# Altium PCB pcb_top.PcbDoc
Units mil, origin at the board's own origin, x right, y up, seen from the top; angles counter-clockwise.
Board outline 1425 x 2300 mil, 2 copper layers (Top Layer, Bottom Layer); 41 components, 38 nets, 200 pads, 108 vias.
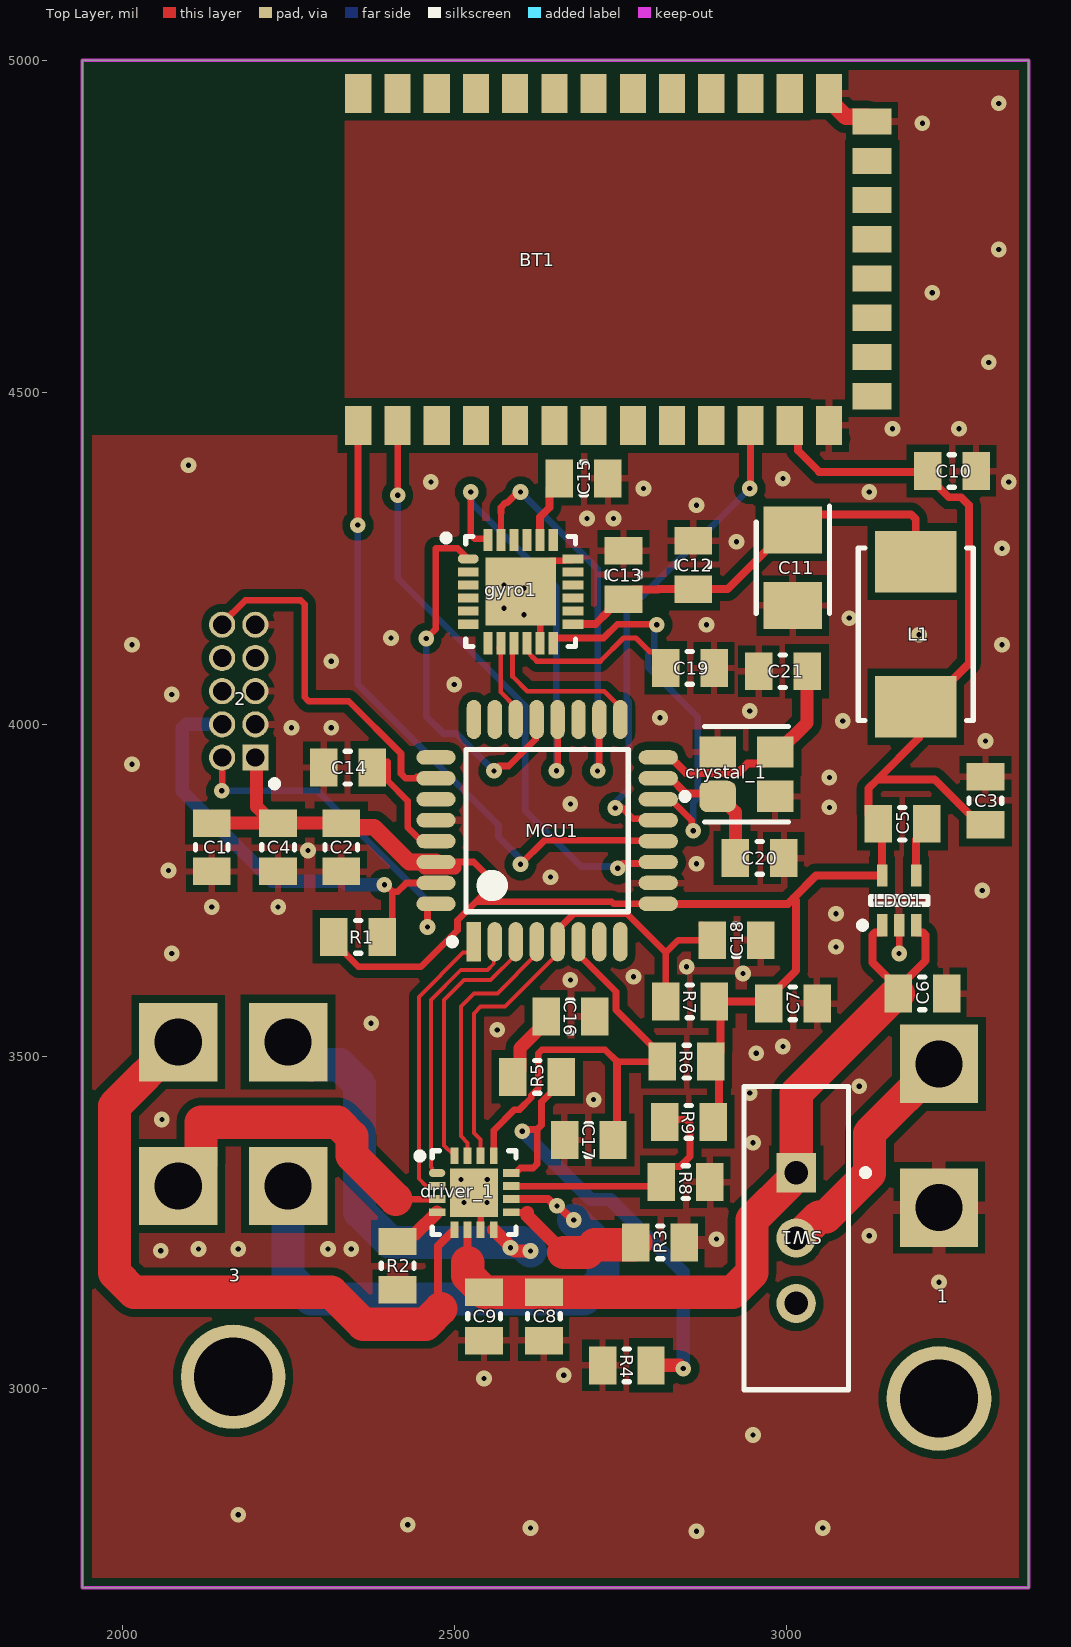
[diagram p0: Top Layer view]
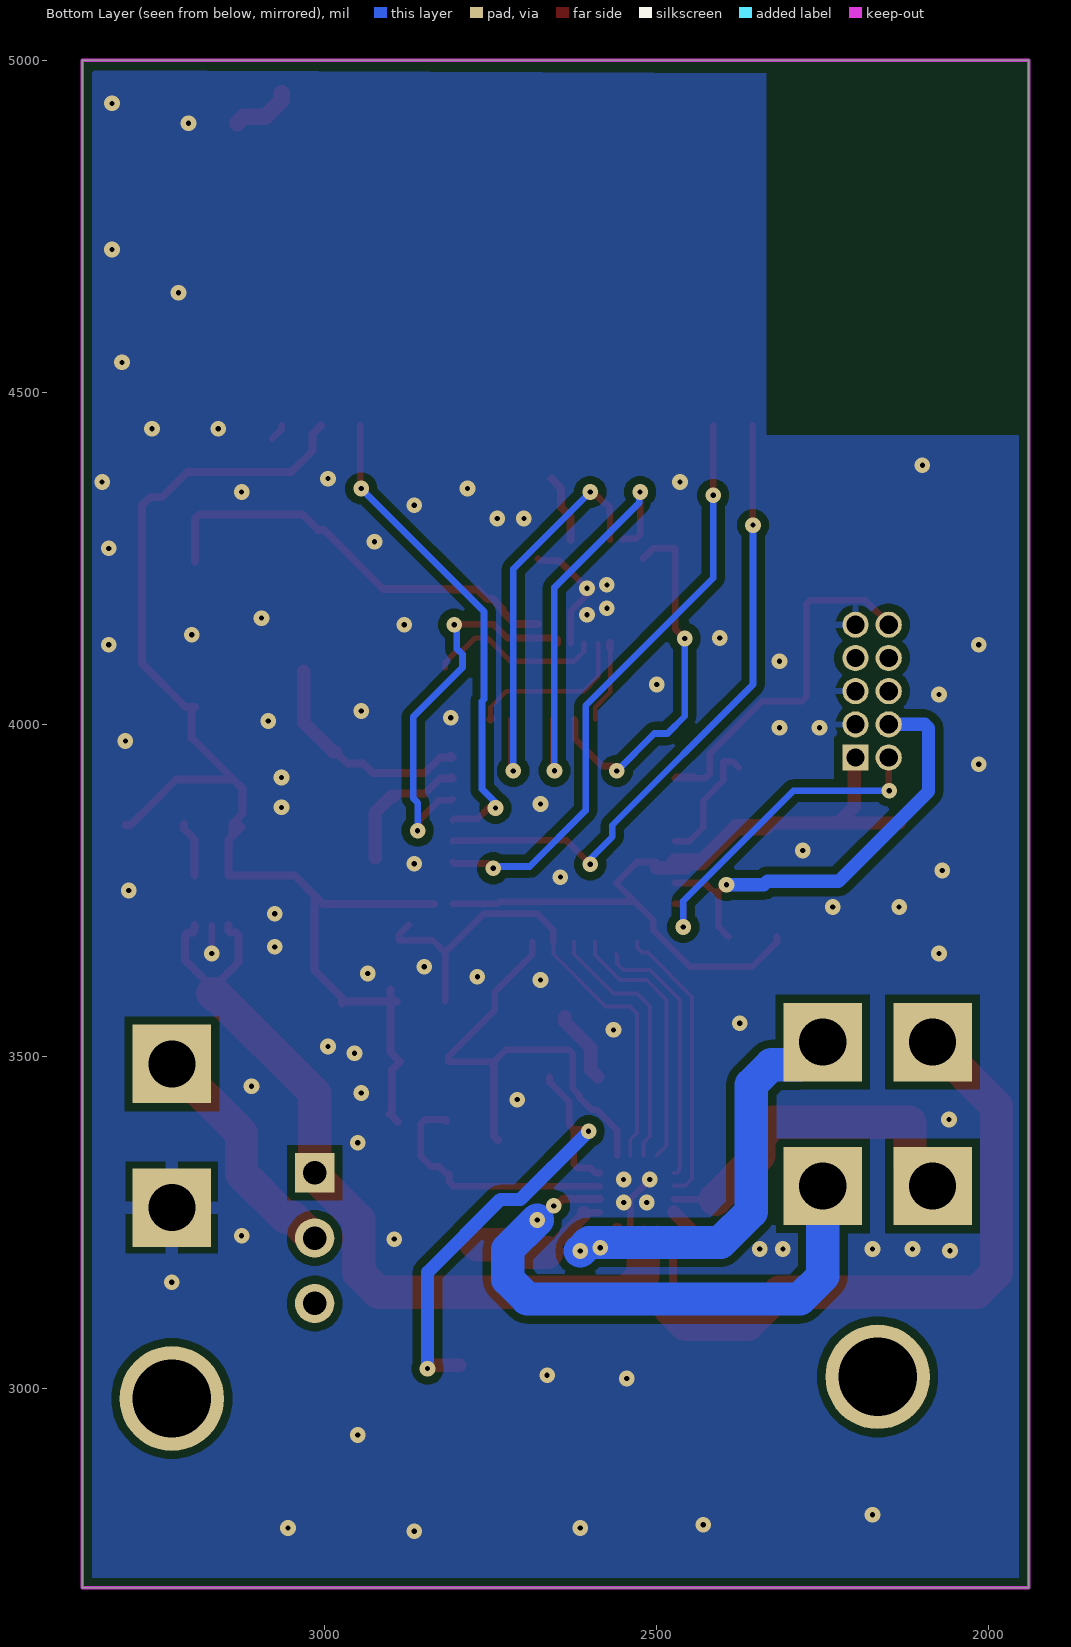
[diagram p1: Bottom Layer view, seen from below]

## Layer stack, top to bottom
Top Solder: solder mask 0.4, Solder Resist, Dk 3.5
Top Layer: signal copper 1.4
Dielectric 1: dielectric 12.6, FR-4, Dk 4.8
Bottom Layer: signal copper 1.4
Bottom Solder: solder mask 0.4, Solder Resist, Dk 3.5

## Board outline
1940,2700 3365,2700 3365,5000 1940,5000

## Design rules (kind name [scope] priority, off if disabled: settings)
Clearance [All] p1: gap=12 ignorepadtopadclearanceinfootprint=TRUE except(0: Arc-Hole Track-Hole SMDPad-Hole THPad-Hole Via-Hole Fill-Hole Poly-Hole Region-Hole Text-Hole; 1.97: Arc-SMDPad Track-SMDPad; 4.13: Arc-Arc Arc-Track Track-Track; 5: Arc-Via Track-Via SMDPad-Via)
HoleSize [All] p1: absolutevalues=TRUE maxlimit=120 minlimit=1 maxpercent=80.000 minpercent=20.000
MinimumSolderMaskSliver [All] p1 off: minsoldermaskwidth=10
PolygonConnect [All] p1: thpad.connectstyle=Relief thpad.reliefconductorwidth=10 thpad.reliefentries=4 thpad.polygonreliefangle="90 Angle" thpad.airgapwidth=10 smdpad.connectstyle=Relief smdpad.reliefconductorwidth=10 smdpad.reliefentries=4 smdpad.polygonreliefangle="90 Angle" smdpad.airgapwidth=10 via.connectstyle=Direct via.reliefconductorwidth=10 via.reliefentries=4 via.polygonreliefangle="90 Angle" via.airgapwidth=10
RoutingVias [All] p1: holewidth=7.87 width=23.62 viastyle="Through Hole" minholewidth=7.87 minwidth=23.62 maxholewidth=120 maxwidth=120
SilkToSilkClearance [All] p1 off: silktosilkclearance=10
SilkToSolderMaskClearance [IsPad] p1 off: minsilkscreentomaskgap=10 clearancetoexposedcopper=TRUE
SolderMaskExpansion [All] p1: expansion=4 istentingtop=FALSE
Width [All] p1: maxlimit=100 minlimit=1 preferedwidth=10 toplayer_minwidth=5.91 minimp=50.000000 maximp=50.000000 favimp=50.000000
26 further rules are at their usual default settings.

## Components (designator, comment, footprint, x,y, rotation, side; value= is the part's Value field where it differs from the comment)
1 "39-30-1020" 39-30-1020 3230,2985 r0 top
2 "konektor - GPEA214-0502A005C1BA" "konektor - GPEA214-0502A005C1BA" 2150.74,3950 r90 top
3 "39-30-1040" 39-30-1040 2167.32,3017.6 r0 top
BT1 "BlueTooth module - egbt046s_hc-05" BT_EGBT-046S 3135.2,4444.09 r90 top
C1 "10uF" "0805 (2x1.2)" 2135,3815 r270 top
C2 "10nF" "0805 (2x1.2)" 2330,3815 r270 top
C3 "1uF" "0805 (2x1.2)" 3300,3885 r90 top
C4 "100nF" "0805 (2x1.2)" 2235,3815 r270 top
C5 "10nF" "0805 (2x1.2)" 3175,3850.33 r0 top
C6 "1uF" "0805 (2x1.2)" 3205,3595 r0 top
C7 "100nF" "0805 (2x1.2)" 3010,3580 r0 top
C8 "22uF" "0805 (2x1.2)" 2635,3108.58 r270 top
C9 "2.2uF" "0805 (2x1.2)" 2545,3108.58 r270 top
C10 "100nF" "0805 (2x1.2)" 3249.5,4381.46 r0 top
C11 "100uF" tant_cap_100u 3005,4240 r270 top
C12 "1uF" "0805 (2x1.2)" 2860,4240 r90 top
C13 "100nF" "0805 (2x1.2)" 2755,4225 r90 top
C14 "100nF" "0805 (2x1.2)" 2340,3935 r180 top
C15 "2.2nF" "0805 (2x1.2)" 2695,4370 r0 top
C16 "22nF" "0805 (2x1.2)" 2675,3560 r0 top
C17 "10nF" "0805 (2x1.2)" 2702.75,3374.28 r180 top
C18 "1nF" "0805 (2x1.2)" 2925,3675 r0 top
C19 "100nF" "0805 (2x1.2)" 2855,4085 r0 top
C20 "15pF" "0805 (2x1.2)" 2960,3798.85 r0 top
C21 "15pF" "0805 (2x1.2)" 2995,4080 r180 top
crystal_1 "ABM8G-25.000MHz-B4Y-T" "crystal 3.2x2.5" 2940,3925 r0 top
driver_1 "STSPIN220" "driver - STSPIN220" 2530,3295 r0 top
gyro1 "MPU-6000" "gyro - MPU 6000" 2600,4200 r0 top
L1 "civka - SRR6603-222ML" L_SRR6603-222ML 3195,4135.75 r90 top
LDO1 "MAX8510EXK33+T" "LDO - MAX8510EXK33+T (SC70)" 3170,3735 r90 top
MCU1 "ATSAMD21E18A-AU" "MCU- ATSAMD21E18A-AU" 2640,3840 r90 top
R1 "1kR" "0805 (2x1.2)" 2355.38,3680 r180 top
R2 "330mR" "0805 (2x1.2)" 2415,3185 r90 top
R3 "500mR" "0805 (2x1.2)" 2810,3220 r180 top
R4 "47kR" "0805 (2x1.2)" 2760,3035 r180 top
R5 "1kR" "0805 (2x1.2)" 2625,3469.28 r180 top
R6 "18kR" "0805 (2x1.2)" 2850,3492.16 r0 top
R7 "18kR" "0805 (2x1.2)" 2855,3582.94 r180 top
R8 "1kR" "0805 (2x1.2)" 2848.58,3310.72 r0 top
R9 "18kR" "0805 (2x1.2)" 2853.42,3401.44 r0 top
SW1 "EG1218" "vypinac - EG1218" 3015,3226.57 r270 top

## Footprints (in the part's own frame and the unit in brackets; to place one, negate y for a bottom-side part, rotate by r counter-clockwise, add the part's x,y. Pads: shape width x height; smd on the part's side, far side on the other; paste and mask are expansions set on the pad)
39-30-1020 [mm]
  round 4 hole 3: 0(0,0)
  rect 3x3 hole 1.8: 1(0,7.3) 2(0,12.8)
  body extent -2.7,-6.6 2.7,6.2, height 9.6
39-30-1040 [mm]
  round 4 hole 3: 0(0,0)
  rect 3x3 hole 1.8: 1(2.1,7.3) 2(-2.1,7.3) 3(2.1,12.8) 4(-2.1,12.8)
  body extent -4.8,-6.6 4.8,6.2, height 9.6
"0805 (2x1.2)" [mm] "Chip Resistor, 2-Leads, Body 2.00x1.25mm, IPC Medium Density"
  rect 1.05x1.45 smd: 1(-0.925,0) 2(0.925,0)
  silkscreen extent -0.1,-0.63 0.1,0.63, body extent -1.1,-0.72 1.1,0.72, height 0.5
BT_EGBT-046S [mm]
  rect 1.5x1 smd: 1(0.15,19.8) 2(0.15,18.3) 3(0.15,16.8) 4(0.15,15.3) 5(0.15,13.8) 6(0.15,12.3) 7(0.15,10.8) 8(0.15,9.3) 9(0.15,7.8) 10(0.15,6.3) 11(0.15,4.8) 12(0.15,3.3) 13(0.15,1.8) 22(12.85,1.8) 23(12.85,3.3) 24(12.85,4.8) 25(12.85,6.3) 26(12.85,7.8) 27(12.85,9.3) 28(12.85,10.8) 29(12.85,12.3) 30(12.85,13.8) 31(12.85,15.3) 32(12.85,16.8) 33(12.85,18.3) 34(12.85,19.8)
  rect 1x1.5 smd: 14(1.27,0.15) 15(2.77,0.15) 16(4.27,0.15) 17(5.77,0.15) 18(7.27,0.15) 19(8.77,0.15) 20(10.27,0.15) 21(11.77,0.15)
"crystal 3.2x2.5" [mm]
  rrect50% 1.4x1.2 smd paste+0 mask+0: 1(-1.1,-0.85)
  rect 1.4x1.2 smd paste+0 mask+0: 2(1.1,-0.85) 3(1.1,0.85) 4(-1.1,0.85)
  silkscreen extent -2.47,-1.83 1.6,1.83, body extent -1.9,-1.55 1.9,1.55, height 0.25
"driver - STSPIN220" [mm] "QFN, 24-Leads, Body 4.00x4.00mm, Pitch 0.50mm, Thermal Pad 2.7x2.6mm"
  oval 0.63x0.3 smd: 1(-1.415,0.75)
  rect 0.63x0.3 smd: 2(-1.415,0.25) 3(-1.415,-0.25) 4(-1.415,-0.75) 9(1.415,-0.75) 10(1.415,-0.25) 11(1.415,0.25) 12(1.415,0.75)
  rect 0.3x0.63 smd: 5(-0.75,-1.415) 6(-0.25,-1.415) 7(0.25,-1.415) 8(0.75,-1.415) 13(0.75,1.415) 14(0.25,1.415) 15(-0.25,1.415) 16(-0.75,1.415)
  rect 1.85x1.85 smd: 17(0,0)
  silkscreen extent -2.2,-1.6 1.6,1.6, body extent -1.5,-1.5 1.5,1.5, height 0.95
"gyro - MPU 6000" [mm] "QFN, 24-Leads, Body 4.00x4.00mm, Pitch 0.50mm, Thermal Pad 2.7x2.6mm"
  oval 0.8x0.35 smd: 1(-2,1.25)
  rect 0.8x0.35 smd: 2(-2,0.75) 3(-2,0.25) 4(-2,-0.25) 5(-2,-0.75) 6(-2,-1.25) 13(2,-1.25) 14(2,-0.75) 15(2,-0.25) 16(2,0.25) 17(2,0.75) 18(2,1.25)
  rect 0.35x0.85 smd: 7(-1.25,-1.975) 8(-0.75,-1.975) 9(-0.25,-1.975) 10(0.25,-1.975) 11(0.75,-1.975) 12(1.25,-1.975) 19(1.25,1.975) 20(0.75,1.975) 21(0.25,1.975) 22(-0.25,1.975) 23(-0.75,1.975) 24(-1.25,1.975)
  rect 2.7x2.6 smd: 25(0,0)
  silkscreen extent -2.97,-2.1 2.1,2.17, body extent -2,-2 2,2, height 0.95
"konektor - GPEA214-0502A005C1BA" [mm] "GPEA214-0502A005C1BA"
  rect 1x1 hole 0.7: 1(0,-1.27)
  round 1 hole 0.7: 2(1.27,-1.27) 3(2.54,-1.27) 4(3.81,-1.27) 5(5.08,-1.27) 6(0,0) 7(1.27,0) 8(2.54,0) 9(3.81,0) 10(5.08,0)
  silkscreen extent -1.12,-2.13 -0.88,-1.88, body extent -0.64,-2.33 5.71,1.06, height 0.25
L_SRR6603-222ML [mm]
  rect 2.35x3.1 smd: 1(-2.775,0) 2(2.775,0)
  silkscreen extent -3.3,-2.2 3.3,2.2, body extent -3.4,-2.2 3.4,2.2, height 3.1
"LDO - MAX8510EXK33+T (SC70)" [mm] "SOT353, 5-Leads, Body 2x1.3mm, Pitch 0.65mm, Lead Span 2.1mm, IPC Medium Density"
  rect 0.85x0.4 smd: 1(-0.95,0.65) 2(-0.95,0) 3(-0.95,-0.65) 4(0.95,-0.65) 5(0.95,0.65)
  silkscreen extent -1.07,-1.1 0.15,1.52, body extent -0.67,-1.1 0.68,1.1, height 1.1
"MCU- ATSAMD21E18A-AU" [mm] "TQFP, 32-Leads, Body 7.00x7.00mm, Pitch 0.80mm, IPC Medium Density"
  rect 1.5x0.55 smd: 1(-4.25,2.8)
  oval 1.5x0.55 smd: 2(-4.25,2) 3(-4.25,1.2) 4(-4.25,0.4) 5(-4.25,-0.4) 6(-4.25,-1.2) 7(-4.25,-2) 8(-4.25,-2.8) 17(4.25,-2.8) 18(4.25,-2) 19(4.25,-1.2) 20(4.25,-0.4) 21(4.25,0.4) 22(4.25,1.2) 23(4.25,2) 24(4.25,2.8)
  oval 0.55x1.5 smd: 9(-2.8,-4.25) 10(-2,-4.25) 11(-1.2,-4.25) 12(-0.4,-4.25) 13(0.4,-4.25) 14(1.2,-4.25) 15(2,-4.25) 16(2.8,-4.25) 25(2.8,4.25) 26(2,4.25) 27(1.2,4.25) 28(0.4,4.25) 29(-0.4,4.25) 30(-1.2,4.25) 31(-2,4.25) 32(-2.8,4.25)
  silkscreen extent -4.37,-3.1 3.1,3.75, body extent -3.5,-3.5 3.5,3.5, height 1.2
tant_cap_100u [mm] "tantalum 100uF cap, 6.3V"
  rect 1.8x2.25 smd: 1(-1.344,0.124) 2(1.556,0.124)
  silkscreen extent -2.24,-1.28 1.86,1.52, body extent -1.73,-1.38 1.97,1.62, height 2.11
"vypinac - EG1218" [mm] "THD, 3-Leads, Body 11.6x4mm, Pitch 2.5mm"
  rect 1.5x1.5 hole 0.9: 1(-2.5,0)
  round 1.5 hole 0.9: 2(0,0) 3(2.5,0)
  silkscreen extent -5.8,-2 5.8,2.78, body extent -5.8,-2 5.8,2, height 7.4

## Part data
1: "Connector Wire to Board Header 2 Position 4.2mm Solder Right Angle Thru-Hole Bag", Color=Natural, Contact Resistance=10mR, Current Rating=13A, Flammability Rating="UL94 V-0", Housing Color=Black, Manufacturer=Molex, Max Operating Temperature=105°C, Min Operating Temperature=-40°C, Package Quantity=8000, Voltage Rating=600V, Approvals=UL,CSA,TUV, Category="Headers and Wire Housings", ComponentLink1Description=https://datasheet.ciiva.com/6814/039301100-sd-6814020.pdf?src-supplier=Digi-Key, ComponentLink1URL=https://datasheet.ciiva.com/6814/039301100-sd-6814020.pdf?src-supplier=Digi-Key, ComponentLink2Description=https://datasheet.ciiva.com/11747/0900766b805f2c40-11747493.pdf?src-supplier=RSComponents, ComponentLink2URL=https://datasheet.ciiva.com/11747/0900766b805f2c40-11747493.pdf?src-supplier=RSComponents, ComponentLink3Description=https://datasheet.ciiva.com/30130/183450039301020-pcb-headers-30130157.pdf?src-supplier=Onlinecomponents.com, ComponentLink3URL=https://datasheet.ciiva.com/30130/183450039301020-pcb-headers-30130157.pdf?src-supplier=Onlinecomponents.com, Connector Type="Male Pin", Contact Gender=Male, Contact Material=Brass, Contact Plating=Tin,Copper, Contact Type="Male Pin", Depth=19.4mm, Fastening Type=Ramp, Gender=Male, Height=14.76mm, Housing Material=Nylon, Length=5.4mm, Manufacturer Part Number=39-30-1020, Mount="Through Hole", Number of Circuits=2, Number of Contacts=2, Number of Ports=1, Number of Positions=2, Number of Rows=2, Number of Terminals/Pins=2, Orientation="Right Angle", Packaging=Bulk, Pitch=4.2mm, Pricing 1="1=0,66000, 10=0,55300, 100=0,43000, 1000=0,33784, 5000=0,29689, 10000=0,27641 (USD)", Pricing 2="1=0,48700, 10=0,41400, 50=0,36800, 100=0,32100, 500=0,30600, 1000=0,25200 (GBP)", Radiation Hardening=No, REACH SVHC=Unknown, RoHS=Yes, RoHS Compliant=Yes, Row Spacing=0.165inch, Series="Mini-Fit® Jr™ 5569", Stock 1=12451, Stock 2=24772, Supplier 1=Digi-Key, Supplier 2=Farnell, Termination=Solder
2: "Connector, Header, 10POS, 2ROW, 1.27MM", Manufacturer=Greenconn, Manufacturer Part Number=GPEA214-0502A005C1BA, Pricing 1="1=0,02800, 250=0,02800, 500=0,02800, 1000=0,02800, 5000=0,02800 (USD)", Pricing 2="10=0,23100, 100=0,17100, 500=0,15400, 1000=0,13600, 2500=0,12800, 5000=0,12500 (GBP)", RoHS=No, Stock 1=230, Stock 2=8410, Supplier 1=Newark, Supplier 2=Farnell
3: "Connector Wire to Board Header 4 Position 4.2mm Solder Right Angle Thru-Hole Tray", Color=Natural, Contact Resistance=10mR, Current Rating=13A, Flammability Rating="UL94 V-0", Insulation Resistance=1GR, Manufacturer=Molex, Max Operating Temperature=105°C, Min Operating Temperature=-40°C, Package Quantity=4000, Voltage Rating=600V, Approvals=UL,CSA,TUV, Category="Headers and Wire Housings", ComponentLink1Description=https://datasheet.ciiva.com/3935/240160039301040-pcb-headers-3935946.pdf?src-supplier=Arrow+Electronics, ComponentLink1URL=https://datasheet.ciiva.com/3935/240160039301040-pcb-headers-3935946.pdf?src-supplier=Arrow+Electronics, ComponentLink2Description=https://datasheet.ciiva.com/26921/getdatasheetpartid-176629-26921992.pdf?src-supplier=Verical, ComponentLink2URL=https://datasheet.ciiva.com/26921/getdatasheetpartid-176629-26921992.pdf?src-supplier=Verical, ComponentLink3Description=https://datasheet.ciiva.com/19461/1969163-19461149.pdf?src-supplier=Jameco, ComponentLink3URL=https://datasheet.ciiva.com/19461/1969163-19461149.pdf?src-supplier=Jameco, ComponentLink4Description=https://datasheet.ciiva.com/11748/0900766b805f2c40-11748053.pdf?src-supplier=RSComponents, ComponentLink4URL=https://datasheet.ciiva.com/11748/0900766b805f2c40-11748053.pdf?src-supplier=RSComponents, ComponentLink5Description=https://datasheet.ciiva.com/5162/0039301040-pcb-headers-160097-5162586.pdf?src-supplier=Mouser, ComponentLink5URL=https://datasheet.ciiva.com/5162/0039301040-pcb-headers-160097-5162586.pdf?src-supplier=Mouser, ComponentLink6Description=https://datasheet.ciiva.com/18454/70190747-18454021.pdf?src-supplier=Allied+Electronics, ComponentLink6URL=https://datasheet.ciiva.com/18454/70190747-18454021.pdf?src-supplier=Allied+Electronics, Connector Type=Power,Rectangular, Contact Gender=Male, Contact Material=Brass, Contact Plating=Tin,Copper, Contact Type="Male Pin", Depth=19.4mm, ELV=Compliant, Fastening Type=Ramp, Gender=Male, Glow Wire Compliant=Non-compliant, Halogen Free="Low Halogen", Height=13.38mm, Housing Color=Natural, Housing Material=Nylon, Lead Free="Lead Free", Length=9.6mm, Manufacturer Part Number=39-30-1040, Material=Nylon, Mating Cycles=30, Mount="Through Hole", Number of Circuits=4, Number of Contacts=4, Number of Poles=4, Number of Ports=1, Number of Positions=4, Number of Rows=2, Orientation="Right Angle", Packaging=Bulk, Pitch=4.2mm, Pricing 1="5=0,89800, 100=0,68900, 375=0,65200, 1500=0,49600, 3000=0,47100, 5=0,64400, 100=0,49400, 375=0,46800, 1500=0,35600, 3000=0,33800 (USD)", Pricing 2="1=0,64500, 10=0,52900, 50=0,52800, 100=0,52700, 500=0,50700, 1000=0,49600 (GBP)", Radiation Hardening=No, REACH SVHC="No SVHC", RoHS=Yes, RoHS Compliant=Yes, Row Spacing=0.165inch, Series="Mini-Fit® Jr™ 5569", Stock 1=3250, Stock 2=793, Supplier 1=RSComponents, Supplier 2=Farnell, Termination=Solder, Voltage Rating (AC)=600V, Voltage Rating (DC)=600V, Working Voltage=600V
C1: library part "C0805 (2x1.2)", Case/Package=0805, Capacitance=10uF, ComponentLink1Description=http://www.mouser.com/ds/2/40/f93-776559.pdf?src-supplier=Mouser, ComponentLink1URL=http://www.mouser.com/ds/2/40/f93-776559.pdf?src-supplier=Mouser, ComponentLink2Description=http://www.farnell.com/datasheets/2602419.pdf?src-supplier=Farnell, ComponentLink2URL=http://www.farnell.com/datasheets/2602419.pdf?src-supplier=Farnell, ComponentLink3Description=http://datasheets.avx.com/F93.pdf?src-supplier=Digi-Key, ComponentLink3URL=http://datasheets.avx.com/F93.pdf?src-supplier=Digi-Key, ComponentLink4Description=http://www.farnell.com/datasheets/2602419.pdf?src-supplier=Newark, ComponentLink4URL=http://www.farnell.com/datasheets/2602419.pdf?src-supplier=Newark
C2 C3 C4 C5 C6 C7 C8 C9 C10 C12 C13 C14 C15 C16 C17 C18 C19 C20 C21: library part "C0805 (2x1.2)", Capacitance=10uF, Case/Package=0805, ComponentLink1Description=http://www.mouser.com/ds/2/40/f93-776559.pdf?src-supplier=Mouser, ComponentLink1URL=http://www.mouser.com/ds/2/40/f93-776559.pdf?src-supplier=Mouser, ComponentLink2Description=http://www.farnell.com/datasheets/2602419.pdf?src-supplier=Farnell, ComponentLink2URL=http://www.farnell.com/datasheets/2602419.pdf?src-supplier=Farnell, ComponentLink3Description=http://datasheets.avx.com/F93.pdf?src-supplier=Digi-Key, ComponentLink3URL=http://datasheets.avx.com/F93.pdf?src-supplier=Digi-Key, ComponentLink4Description=http://www.farnell.com/datasheets/2602419.pdf?src-supplier=Newark, ComponentLink4URL=http://www.farnell.com/datasheets/2602419.pdf?src-supplier=Newark
C11: library part tantal_cap_100u, "100uF tantal capacitor, 6.3 V"
crystal_1: library part "crystal 3.2x2.5", "CRYSTAL 25.0000MHZ 10PF SMD", Case/Package=SMD/SMT, ESR (Equivalent Series Resistance)=60R, Frequency=25MHz, Frequency Stability=30ppm, Load Capacitance=10pF, Max Operating Temperature=70°C, Min Operating Temperature=-20°C, Operating Frequency="25 MHz", Package Quantity=1000, Depth=2.5mm, Frequency Tolerance=30ppm, Height=0.039inch, Lead Free="Lead Free", Length=3.2mm, Mount="Surface Mount", Number of Pins=4, Packaging="Tape and Reel", Series=ABM8G, Series Resistance=60R, Termination=SMD/SMT, Tolerance=30ppm, Width=0.098inch
driver_1: library part "driver - STSPIN220", "STSPIN220 Series 10 V Quad Surface Mount Stepper Motor Driver - VFQFPN-16", Manufacturer=STMicroelectronics, Max Operating Temperature=150°C, Min Operating Temperature=-40°C, Output Current=1.3A, Category=MOSFETs, ComponentLink1Description=http://www.farnell.com/datasheets/2815804.pdf?src-supplier=Farnell, ComponentLink1URL=http://www.farnell.com/datasheets/2815804.pdf?src-supplier=Farnell, ComponentLink2Description=http://www.st.com/content/ccc/resource/technical/document/datasheet/group3/42/7e/5c/90/70/ef/47/95/DM00291865/files/DM00291865.pdf/jcr:content/translations/en.DM00291865.pdf?src-supplier=Digi-Key, ComponentLink2URL=http://www.st.com/content/ccc/resource/technical/document/datasheet/group3/42/7e/5c/90/70/ef/47/95/DM00291865/files/DM00291865.pdf/jcr:content/translations/en.DM00291865.pdf?src-supplier=Digi-Key, ComponentLink3Description=http://www.farnell.com/datasheets/2815804.pdf?src-supplier=Newark, ComponentLink3URL=http://www.farnell.com/datasheets/2815804.pdf?src-supplier=Newark, Logic Function="AND GATE", Manufacturer Part Number=STSPIN220, Mount="Surface Mount", Packaging="Cut Tape", Pricing 1="1=1,89000, 10=1,69900, 25=1,60320, 100=1,36600, 250=1,28260, 500=1,12228, 1000=1,05875 (USD)", Pricing 2="1=2,38000, 10=1,73000, 50=1,66000, 100=1,58000 (GBP)", RoHS=Yes, RoHS Compliant=Yes, Stock 1=1040, Stock 2=3459, Supplier 1=Digi-Key, Supplier 2=Farnell
gyro1: library part "gyro - MPU 6000", "3-Axis Gyroscope 3-Axis Accelerometer Motion Processing Unit with I2C and SPI, 2.5, 3 or 3.3 V, -40 to 85 degC, 24-Pin QFN, RoHS, Tape and Reel", Manufacturer=InvenSense, Operating Temperature=-40degC~85degC(TA), Package Description="24-Pin Quad Flat No-lead Package, Body 4 x 4 mm, Pitch 0.5 mm", Package Reference=QFN-24, Standard Package=5,000, Category=Sensors,Transducers, Datasheet URL=https://www.invensense.com/wp-content/uploads/2015/02/MPU-6000-Datasheet1.pdf, Datasheet Version="Rev. 3.4, 08/2013", Family=Multifunction, Featured Product=MPU60006AxisIntegratedSPISolution, Manufacturer URL=http://www.invensense.com/, Online Catalog=MPU-6000™Series, Other Names="1428-1005-2 / MPU6000", Output Type=I²C,SPI, Sensor Type=Accelerometer,Gyroscope,3Axis
L1: "Inductor Power Shielded Wirewound 2200uH 20% 100KHz 50Q-Factor Ferrite 0.1A 8.5Ohm DCR T/R", Case/Package=Nonstandard, Current Rating=100mA, DC Resistance (DCR)=8.5R, Inductance=2.2mH, Inductance Tolerance=20%, Manufacturer=Bourns, Manufacturer Part Number=SRR6603-222ML, Max Operating Temperature=125°C, Min Operating Temperature=-55°C, Package Quantity=600, Resistor Type=Wirewound, Saturation Current=28mA, Self Resonant Frequency=2MHz, Test Frequency=100kHz, Category="Fixed Inductors", ComponentLink1Description=https://datasheet.ciiva.com/22717/1727926-22717872.pdf?src-supplier=Element14, ComponentLink1URL=https://datasheet.ciiva.com/22717/1727926-22717872.pdf?src-supplier=Element14, ComponentLink2Description=https://datasheet.ciiva.com/17285/srr6603-17285749.pdf?src-supplier=Avnet+Europe, ComponentLink2URL=https://datasheet.ciiva.com/17285/srr6603-17285749.pdf?src-supplier=Avnet+Europe, ComponentLink3Description=https://datasheet.ciiva.com/1073/srr6603-1073449.pdf?src-supplier=Digi-Key, ComponentLink3URL=https://datasheet.ciiva.com/1073/srr6603-1073449.pdf?src-supplier=Digi-Key, ComponentLink4Description=https://datasheet.ciiva.com/1073/srr6603-1073450.pdf?src-supplier=Digi-Key, ComponentLink4URL=https://datasheet.ciiva.com/1073/srr6603-1073450.pdf?src-supplier=Digi-Key, Core Material=Ferrite, DC Current=100mA, Depth=4.4mm, Height=3mm, Height - Seated (Max)=0.118inch, Length=6.6mm, Max DC Current=100mA, Military Standard=Not, Mount="Surface Mount", Number of Pins=2, Packaging="Tape and Reel", Pricing 1="1=1,49000, 10=1,38400, 25=1,27760, 50=1,06460, 100=1,00070, 250=0,89420 (USD)", Q Factor=50, Radiation Hardening=No, REACH SVHC="No SVHC", RMS Current (Irms)=100mA, RoHS=Yes, Shielding=Shielded, Stock 1=631, Supplier 1=Digi-Key, Termination=SMD/SMT, Tolerance=20%, Width=0.173inch
LDO1: library part "LDO - MAX8510EXK33+T", "Ultra-Low-Noise, High PSRR, Low-Dropout, 120mA Linear Regulator, 3.3V Out, 5-Pin SC70, -40°C to +85°C, Pb-Free, Tape and Reel", Code_JEDEC=MO-203, ComponentLink1Description="Manufacturer URL", ComponentLink1URL=http://www.maxim-ic.com, ComponentLink2Description=Datasheet, ComponentLink2URL=http://datasheets.maxim-ic.com/en/ds/MAX8510-MAX8512.pdf, ComponentLink3Description="Package Specification", ComponentLink3URL=http://pdfserv.maxim-ic.com/package_dwgs/21-0076.PDF, DatasheetVersion="Rev 4, Aug-2011", PackageDescription="5-Pin SC70 Transistor Package, 0.65 mm Pitch, 2.2 mm Lead Span", PackageReference=X5+1, PackageVersion="revE, 2006"
MCU1: library part "MCU - ATSAMD21E18A-AU", "Low-Power, 32-bit Cortex-M0+ MCU with advanced Analog and PWM"
R1 R2 R3 R4 R5 R6 R7 R8 R9: library part R0805, "Resistor 470R, 1206, 1%"
SW1: library part "vypinac - EG1218", "Slide Switch, 500 V, -20 to 70 degC, 3-Pin THD, RoHS", Case\Package=SOT-23-5, Dropout Voltage="300 mV", Max Input Voltage="8 V", Max Operating Temperature="85 degC", Max Ouput Current="150 mA", Max Power Dissipation="250 mW", Min Input Voltage="4.3 V", Min Operating Temperature="-40 degC", Nominal Output Voltage="3.3 V", Package Quantity=3000, ComponentLink1Description="Manufacturer URL", ComponentLink1URL=http://www.e-switch.ch/en/, ComponentLink2Description=Datasheet, ComponentLink2URL=https://www.e-switch.com/system/asset/product_line/data_sheet/119/EG.pdf, DatasheetVersion=Oct-15, Height="1.3 mm", Length="3 mm", Mount="Surface Mount", Output Current="150 mA", Output Voltage="3.3 V", Outputs=1, PackageDescription="3-Pin Through Hole Device, Body 11.6 x 4 mm, Pitch 2.5 mm", PackageReference=EG1218, Packaging="Tape and Reel", Pins=5, Power Rating="250 mW", Radiation Hardening=No, REACH SVHC="No SVHC", RoHSCompliant=true, Width="1.8 mm"

## Via types
v1: diameter 23.62, hole 7.87, Top Layer to Bottom Layer, 108 vias

## Nets (pads, with @x,y where several pads share a name; then routed paths per layer and width w, separated by ;. In a path a pad name is that pad's centre, name@x,y a point inside that pad or via, vN(x,y) a via of type N, cw(c..) or ccw(c..) an arc to the next point about the centre after c; other vN are vias at no path point)
GND: 1.1 2.2 2.3 2.5 BT1.13 BT1.21 BT1.22 C1.2 C2.2 C3.2 C4.2 C6.2 C7.2 C8.2 C9.2 C10.2 C11.2 C12.2 C13.2 C14.2 C15.2 C16.2 C17.2 C18.2 C19.2 C20.2 C21.2 crystal_1.2 crystal_1.4 driver_1.7 driver_1.17 gyro1.11 gyro1.18 gyro1.25 LDO1.2 MCU1.10 MCU1.28 R2.1 R3.1 R4.2 R8.2 | length 445.6
  Top Layer w10: v1(2510.31,3314.82) 2510.31,3314.69 2539.84,3285.16 driver_1.7 ; gyro1.11 2629.53,4170.47 gyro1.25 ; gyro1.18 2676.85,4247.32 2667.99,4247.32 2666.85,4246.18 2646.18,4246.18 v1(2605,4205) ; BT1.13 3064.33,4444.69 BT1.13@3079.02,4430 ; v1(3170,3655) LDO1.2 ; gyro1.25 v1(2605,4205) ; gyro1.25 2601.97,4200 2601.97,4201.97 v1(2605,4205)
  Top Layer w25: BT1.22 3064.33,4940.16 3089.82,4914.67 3122.11,4914.67 BT1.21 BT1.21@3131.77,4905
  other v1: 2865,2785 2615,2790 3055,2790 2430,2795 2175,2810 2950,2930 2545,3015 2665,3020 3230,3160 2058.31,3207.51 2115,3210 2175,3210 2310,3210 2345,3210 2895,3225 3125,3230 2515,3280 2549.5,3280 2549.82,3314.68 2950,3370 2060,3405 2710,3435 2945,3445 3110,3455 2955,3505 2995,3515 2565,3540 2375,3550 2675,3615 2770,3620 2935,3625 2850,3635 2075,3655 3075,3665 3075,3715 2135,3725 2235,3725 3295,3750 2645,3770 2070,3780 2865,3790 2280,3810 3065,3875 2675,3880 3065,3920 2015,3940 3300,3975 2255,3995 2315,3995 3085,4005 2810,4010 2945,4020 2075,4045 2500,4060 2315,4095 2015,4120 3325,4120 2405,4130 3200,4135 2880,4150 3095,4160 2605,4165 2575,4175 2575,4210 3325,4265 2925,4275 2700,4310 2740,4310 2865,4330 3125,4350 2785,4355 2465,4365 3335,4365 2995,4370 2100,4390 3160,4445 3260,4445 3305,4545 3220,4650 3320,4715 3205,4905 3320,4935
Net1_2: 1.2 SW1.2 | length 359
  Top Layer w50: SW1.2 3017.45,3226.57 3049.35,3258.47 3059.85,3258.47 3125.23,3323.85 3125.23,3384.17 1.2
Net2_6: 2.6 MCU1.32 | length 512.5
  Top Layer w10: v1(2150,3900) 2150.74,3900.74 2.6 ; v1(2460,3695) 2460,3724.38 2465.38,3729.76 MCU1.32
  Bottom Layer w10: v1(2150,3900) 2294.23,3900 2460,3734.23 v1(2460,3695)
Net2_7: 2.7 MCU1.31 R1.1 | length 681.8
  Top Layer w10: R1.1 2407.09,3695.29 2407.09,3748.04 ; v1(2395,3758.48) 2396.65,3758.48 2407.09,3748.04 ; MCU1.31 2428.15,3761.26 2414.93,3748.04 2407.09,3748.04
  Bottom Layer w20: 2.7 2096.48,4000 2090.74,3994.26 2090.74,3899.26 2226.19,3763.81 2333.33,3763.81 2338.66,3758.48 v1(2395,3758.48)
Net2_10: 2.10 MCU1.26 | length 578.7
  Top Layer w10: 2.10 2150.74,4151.88 2185.54,4186.69 2269.14,4186.69 2275,4180.83 2275,4040.86 2280.93,4034.92 2341.3,4034.92 2420,3956.23 2420,3925.86 2427.12,3918.74 MCU1.26 2470.45,3920.97 MCU1.26@2443.89,3920.97
Net3_1: 3.1 driver_1.10 | length 852.1
  Top Layer w12: driver_1.10 2585.71,3285.61 2641.25,3285.61 2651.86,3275 v1(2655,3275) 2656.91,3275 2678.09,3253.81 v1(2680,3253.81)
  Bottom Layer w50: 3.1 2250,3169.29 2284.29,3135 2695,3135 2724.29,3164.29 2724.29,3209.52 v1(2680,3253.81)
Net3_3: 3.3 driver_1.8 | length 724.9
  Top Layer w20: driver_1.8 v1@2586.08,3212.74 ; v1(2585,3212) 2585.98,3212 2590.98,3207 v1(2615,3207)
  Top Layer w50: 3.3 3.3@2284.06,3487.48
  Bottom Layer w50: 3.3 2284.06,3487.48 2327.52,3487.48 2357.68,3457.32 2357.68,3266.35 2404.03,3220 2602,3220 v1(2615,3207)
Net3_4: 3.4 driver_1.5 | length 1035
  Top Layer w12: 2475.69,3134.6 2475.69,3214.51 driver_1.5
  Top Layer w50: 3.4 1988.59,3425.48 1988.59,3174.29 2017.88,3145 2315,3145 2363.06,3096.94 2456.94,3096.94 2480,3120
NetBT1_1: BT1.1 MCU1.12 | length 985
  Top Layer w10: v1(2355,4300) 2355.33,4300.33 2355.33,4449.67 BT1.1 ; v1(2600,3789.4) 2635.9,3825.29 2763.57,3825.29 2764.24,3824.63 2806.95,3824.63 MCU1.12
  Bottom Layer w10: v1(2355,4300) 2355,4060 2566.84,3848.16 2566.84,3830.68 2600,3797.51 v1(2600,3789.4)
NetBT1_2: BT1.2 MCU1.11 | length 899.6
  Top Layer w10: BT1.2 2414.86,4449.86 2414.86,4350.14 v1@2415,4350 ; v1(2746.17,3783.29) 2753.41,3790.53 2805.09,3790.53 MCU1.11
  Bottom Layer w10: v1@2415,4350 2415,4220 2607,4028 2607,3870.26 2691.17,3786.09 2743.38,3786.09 v1(2746.17,3783.29)
  other v1: 2415,4345
NetBT1_11: BT1.11 MCU1.13 | length 735
  Top Layer w10: v1(2742.67,3874) 2753.49,3874 2769.51,3857.98 2805.09,3857.98 MCU1.13 ; v1(2945,4355) 2946.22,4356.22 BT1.11
  Bottom Layer w10: v1(2742.67,3874) 2742.67,3882.11 2763,3902.45 2763,4034.73 2760.01,4037.72 2760.01,4170.01 v1(2945,4355)
NetC5_2: C5.2 LDO1.4 | length 84.5
  Top Layer w12: LDO1.4 3195.59,3826.62 3211.42,3842.45 C5.2
NetC14_1: C14.1 MCU1.29 | length 189.8
  Top Layer w10: C14.1 2385.3,3943.89 2400,3943.89 2400,3915 2430,3885 2430,3845 2444.92,3830.08 2445,3830.08 2450.82,3824.25 MCU1.29
NetC15_1: C15.1 gyro1.20 | length 104.3
  Top Layer w12: gyro1.20 2629.53,4312.49 2643.91,4326.87 2643.91,4355.33 C15.1
NetC16_1: C16.1 R5.2 | length 111.4
  Top Layer w20: R5.2 2599.25,3479.95 2599.25,3512.8 2638.58,3552.13 C16.1
NetC17_1: C17.1 driver_1.13 MCU1.6 R6.1 | length 735.6
  Top Layer w10: driver_1.13 2559.53,3388.64 2590.89,3420 2598.37,3420 2616.22,3437.85 2616.22,3441.22 2626.43,3451.43 2626.43,3504.14 2632.29,3510 2727.16,3510 2745,3492.16 R6.1 2813.58,3500.03 2743.69,3569.92 2743.69,3597.53 2687.24,3653.98 MCU1.6
  Top Layer w12: C17.1 2745,3380.12 2745,3492.16
NetC18_1: C18.1 driver_1.14 MCU1.5 R7.2 | length 795.9
  Top Layer w6: driver_1.14 2539.84,3375.16 2530,3385 2530,3565 2540,3575 2576.77,3575 2655.75,3653.98 MCU1.5
  Top Layer w10: MCU1.5 2655.75,3690.44 2680.3,3715 2760,3715 2818.58,3656.42 ; R7.2 2818.58,3656.42 ; C18.1@2872.91,3698.54 2888.58,3682.87 C18.1 2837.17,3675 2818.58,3656.42
NetC19_1: C19.1 gyro1.10 | length 265.1
  Top Layer w7: gyro1.10@2609.84,4109.73 2618.47,4101.1
  Top Layer w8: gyro1.10@2609.84,4109.73 gyro1.10 ; 2618.47,4101.1 2624.57,4095 2720,4095 2755,4130 2773.58,4130 2794.04,4109.54 2801.91,4109.54 2818.58,4092.87 C19.1
NetC20_1: C20.1 crystal_1.1 MCU1.15 | length 208.8
  Top Layer w12: MCU1.15@2809.17,3920.59 MCU1.15 2826.02,3918.74 2848.52,3896.24 2891.99,3896.24 crystal_1.1
  Top Layer w20: crystal_1.1 2899.65,3891.54 2923.58,3867.6 C20.1
NetC21_1: C21.1 crystal_1.3 MCU1.16 | length 346.3
  Top Layer w12: MCU1.16@2810,3952.91 MCU1.16 2826.02,3950.24 2849.39,3926.87 2927.55,3926.87 2941.52,3940.84 2965.68,3940.84 crystal_1.3
  Top Layer w20: crystal_1.3 2987.24,3958.46 3031.42,4002.64 C21.1
Netdriver_1_1: driver_1.1 MCU1.2 | length 400
  Top Layer w5.91: driver_1.1 2469.39,3324.53 2466.67,3327.26 2466.67,3332.15 2465,3333.82 2465,3585 2510,3630 2550,3630 2559.6,3639.6 2559.6,3652.81 MCU1.2@2561.26,3654.47
Netdriver_1_2: driver_1.2 MCU1.1 | length 428.1
  Top Layer w6: driver_1.2 2473.07,3306.06 2456.7,3306.06 2446.89,3315.87 2446.89,3589.8 2513.45,3656.37 2521.94,3656.37 2529.76,3664.19 MCU1.1
Netdriver_1_4: driver_1.4 R2.2 | length 77.5
  Top Layer w20: R2.2 2425.67,3232.09 2440.91,3232.09 driver_1.4
Netdriver_1_9: driver_1.9 R3.2 | length 222.1
  Top Layer w10: driver_1.9 2586.18,3265 2610,3265
  Top Layer w20: 2610,3265 2610,3260 2665,3205
  Top Layer w50: 2665,3205 2700.22,3205 2711.67,3216.46 2770.04,3216.46 R3.2
Netdriver_1_11: driver_1.11 R8.1 R9.1 | length 384.5
  Top Layer w10: driver_1.11 2806.29,3304.84 R8.1 R8.1@2812.17,3318.59 ; R8.1@2812.17,3323.04 2816.62,3323.04 2827.83,3334.26 2839.97,3334.26 2855.11,3349.4 2855.11,3399.14 2849.25,3405 2817,3405 R9.1
Netdriver_1_12: driver_1.12 R4.1 R5.1 | length 741
  Top Layer w10: driver_1.12 2592.2,3324.53 2599.68,3332 2619.14,3332 2625,3337.86 2625,3390 ; v1(2602.5,3387.5) 2605,3390 2625,3390 ; R5.1 2661.42,3461.41 2631.61,3431.6 2631.61,3396.61 2625,3390
  Top Layer w20: R4.1 2839.02,3035 2844.02,3030 v1(2845,3030)
  Bottom Layer w20: v1(2602.5,3387.5) 2705.35,3284.65 2735.35,3284.65 2845,3175 v1(2845,3030)
Netdriver_1_15: driver_1.15 MCU1.4 | length 394.2
  Top Layer w6: driver_1.15 2520.16,3369.84 2510,3380 2510,3575 2530,3595 2565.28,3595 2624.25,3653.98 MCU1.4
Netdriver_1_16: driver_1.16 MCU1.3 | length 396.4
  Top Layer w6: driver_1.16 2485,3366.18 2485,3585 2515,3615 2555,3615 2592.76,3652.76 MCU1.3
Netgyro1_1: gyro1.1 MCU1.21 | length 563.2
  Top Layer w10: v1(2457.89,4129.3) 2472.26,4143.67 2472.26,4265 2505.47,4265 gyro1.1 ; v1(2560,3930) 2567.27,3937.27 2582.17,3937.27 2622.4,3977.5 2622.4,4005.48 MCU1.21
  Bottom Layer w10: v1(2457.89,4129.3) 2457.89,4012.11 2483.75,3986.25 2503.75,3986.25 v1(2560,3930)
Netgyro1_8: gyro1.8 MCU1.22 | length 124.5
  Top Layer w7: gyro1.8@2570,4115 2570,4048.78 2592.76,4026.02 MCU1.22
  Top Layer w12: gyro1.8@2570,4115 2570.47,4115.47 gyro1.8
Netgyro1_9: gyro1.9 MCU1.17 | length 252.9
  Top Layer w7: gyro1.9@2587.84,4122.24 2587.84,4072.16 2610,4050 2726.26,4050 2750.24,4026.02 MCU1.17
  Top Layer w12: MCU1.17@2748.39,4009.17 MCU1.17
Netgyro1_12: gyro1.12 MCU1.14 | length 604.5
  Top Layer w10: gyro1.12 2649.21,4128.11 2651.1,4130 2725,4130 2745.54,4150.54 v1@2807.01,4150.54 ; MCU1.14 2808.65,3885.91 2828.43,3885.91 MCU1.14@2829.35,3885 ; MCU1.14@2829.78,3885.43 MCU1.14@2829.35,3885 ; v1(2860,3840) 2857.78,3842.22 2857.78,3855.49 2829.18,3884.09 2829.18,3884.83 MCU1.14@2829.35,3885
  Bottom Layer w10: v1@2807.01,4150.54 2801.27,4144.8 2801.27,4114.33 2792.49,4105.54 2792.49,4085.54 2866.72,4011.31 2866.72,3888.95 2860,3882.24 v1(2860,3840)
  other v1: 2805,4150
Netgyro1_23: gyro1.23 MCU1.18 | length 634.7
  Top Layer w9: gyro1.23 2570.47,4318.3
  Top Layer w10: 2570.47,4318.3 2570.47,4326.79 2577.54,4333.86 2580.17,4333.86 2596.31,4350 v1(2600,4350) ; v1(2716,3929.97) 2718.74,3932.71 MCU1.18
  Bottom Layer w10: v1(2600,4350) 2716,4234 v1(2716,3929.97)
Netgyro1_24: gyro1.24 MCU1.20 | length 646.4
  Top Layer w10: v1@2523.25,4350.61 2525,4348.87 2525,4285.5 2530.86,4279.65 2548.9,4279.65 gyro1.24 ; v1(2654,3930.15) 2655.75,3931.9 MCU1.20
  Bottom Layer w10: v1@2523.96,4349.91 2526.46,4347.41 2526.46,4333.54 2654,4206 v1(2654,3930.15)
  other v1: 2525,4350
OUTA1: 3.2 driver_1.3 | length 530
  Top Layer w10: 2411.99,3285.16 driver_1.3
  Top Layer w50: 3.2 2118.7,3339.06 2118.7,3400.47 2119.29,3401.06 2324.38,3401.06 2346.06,3379.38 2346.06,3351.1 2411.99,3285.16
VDD_BLT: 2.1 BT1.12 C1.1 C2.1 C3.1 C4.1 C5.1 C7.1 C10.1 L1.1 LDO1.5 MCU1.9 MCU1.30 R1.2 R6.2 R7.1 R9.2 | length 3182.7
  Top Layer w10: R1.2 2318.97,3672.13 2356.09,3635 2450,3635 2505,3690 2505,3705 2532.94,3732.94 ; MCU1.30@2500.82,3792.76 2529.5,3792.76 2560.88,3761.38 2560.88,3760.88 2532.94,3732.94 ; MCU1.9 2740.24,3729.76 2737.06,3732.94 2532.94,3732.94
  Top Layer w12: MCU1.9@2835.47,3729.76 3002.33,3729.76 3011.28,3738.72 ; R9.2 R9.2@2902,3413.6 ; R7.1 R7.1@2901.09,3582.94 ; R9.2@2898.58,3417.17 2898.58,3479.99 R6.2 2901.09,3506.83 R7.1@2901.09,3582.94 ; R7.1@2901.09,3600.49 R7.1@2901.09,3582.94 ; C7.1@2970.64,3582.94 R7.1@2901.09,3582.94 ; C7.1 2973.58,3587.87 3015,3629.29 3015,3735 3011.28,3738.72 ; BT1.12 3017.97,4437.3 3017.97,4412.03 3049.67,4380.33 3206.33,4380.33 3244.72,4341.94 3263.06,4341.94 3275,4330 3275,4091.73 3209.76,4026.5 L1.1@3200.1,4026.5 ; L1.1 3200.1,4021.4 3200.1,3979.77 3137.66,3917.34 ; C3.1 3292.13,3848.58 3260.41,3880.29 3223.37,3917.34 3137.66,3917.34 ; 3011.28,3738.72 3044.97,3772.4 LDO1.5 3144.41,3826.3 C5.1@3138.58,3832.13 ; 3137.66,3917.34 3123.58,3903.26 3123.58,3891.26 3123.91,3890.93 3123.91,3864.99 3134.45,3854.45 C5.1 ; C5.1@3138.58,3832.13 C5.1 ; C5.1@3138.58,3832.13 3125.35,3845.35 3130.33,3850.33 C5.1
  Top Layer w20: C1.1 C4.1@2227.13,3851.42 ; 2.1 2200.74,3942.09 2202.51,3940.31 2202.51,3876.03 C4.1@2227.13,3851.42 ; C2.1 C4.1 C4.1@2227.13,3851.42 ; MCU1.30@2455.65,3784.06 2500.82,3784.06
  Top Layer w25: C2.1 2336.42,3845 2380,3845 2432.24,3792.76 MCU1.30
VDD_DRIV: C6.1 C8.1 C9.1 driver_1.6 LDO1.1 LDO1.3 SW1.1 | length 1286.7
  Top Layer w12: 2520,3189.89 2520,3239.13 driver_1.6 ; LDO1.1 3144.41,3688.74 3142.54,3686.87 3133.68,3686.87 3130,3683.19 3130,3641.46 C6.1@3168.58,3602.87 ; C6.1 C6.1@3168.58,3602.87 ; LDO1.3 3195.59,3688.74 3197.46,3686.87 3206.32,3686.87 3210,3683.19 3210,3644.29 C6.1@3168.58,3602.87
  Top Layer w50: 2520,3189.89 2520.54,3189.35 2520.54,3170.24 2545,3145.79 C9.1 C8.1 2919.18,3145 2948.47,3174.29 2948.47,3254.13 3010.47,3316.13 3010.47,3320.47 SW1.1 3015,3444.37 3162.08,3591.46 3165.04,3591.46 C6.1
VDD_GYRO: C11.1 C12.1 C13.1 gyro1.13 L1.2 | length 653.8
  Top Layer w12: gyro1.13 2712.49,4150.79 2732.46,4170.76 2732.46,4173.91 2747.13,4188.58 C13.1 2769.67,4203.25 2807.33,4203.25 2807.67,4203.58 C12.1 2911.69,4203.58 3001.02,4292.91 C11.1 3033.26,4316.29 3187.97,4316.29 3195,4309.26 L1.2
pads on no net: 1.0 2.4 2.8 2.9 3.0 BT1.3 BT1.4 BT1.5 BT1.6 BT1.7 BT1.8 BT1.9 BT1.10 BT1.14 BT1.15 BT1.16 BT1.17 BT1.18 BT1.19 BT1.20 BT1.23 BT1.24 BT1.25 BT1.26 BT1.27 BT1.28 BT1.29 BT1.30 BT1.31 BT1.32 BT1.33 BT1.34 gyro1.2 gyro1.3 gyro1.4 gyro1.5 gyro1.6 gyro1.7 gyro1.14 gyro1.15 gyro1.16 gyro1.17 gyro1.19 gyro1.21 gyro1.22 MCU1.7 MCU1.8 MCU1.19 MCU1.23 MCU1.24 MCU1.25 MCU1.27 SW1.3

## Polygon pours and split planes (outlines as drawn)
GND on Top Layer "GND_L01_P009" (solid, pour order 9): 2335,4985 2335,4435 1955,4435 1955,2715 3350,2715 3350,4985
GND on Bottom Layer "GND_L02_P010" (solid, pour order 10): 2335,4980 2335,4435 1955,4435 1955,2715 3350,2715 3350,4985

## Keep-outs
Keep-Out Layer:
  the board outline again, w5